# EAGLE board PCB-3 v28 (EAGLE 9.7.0)
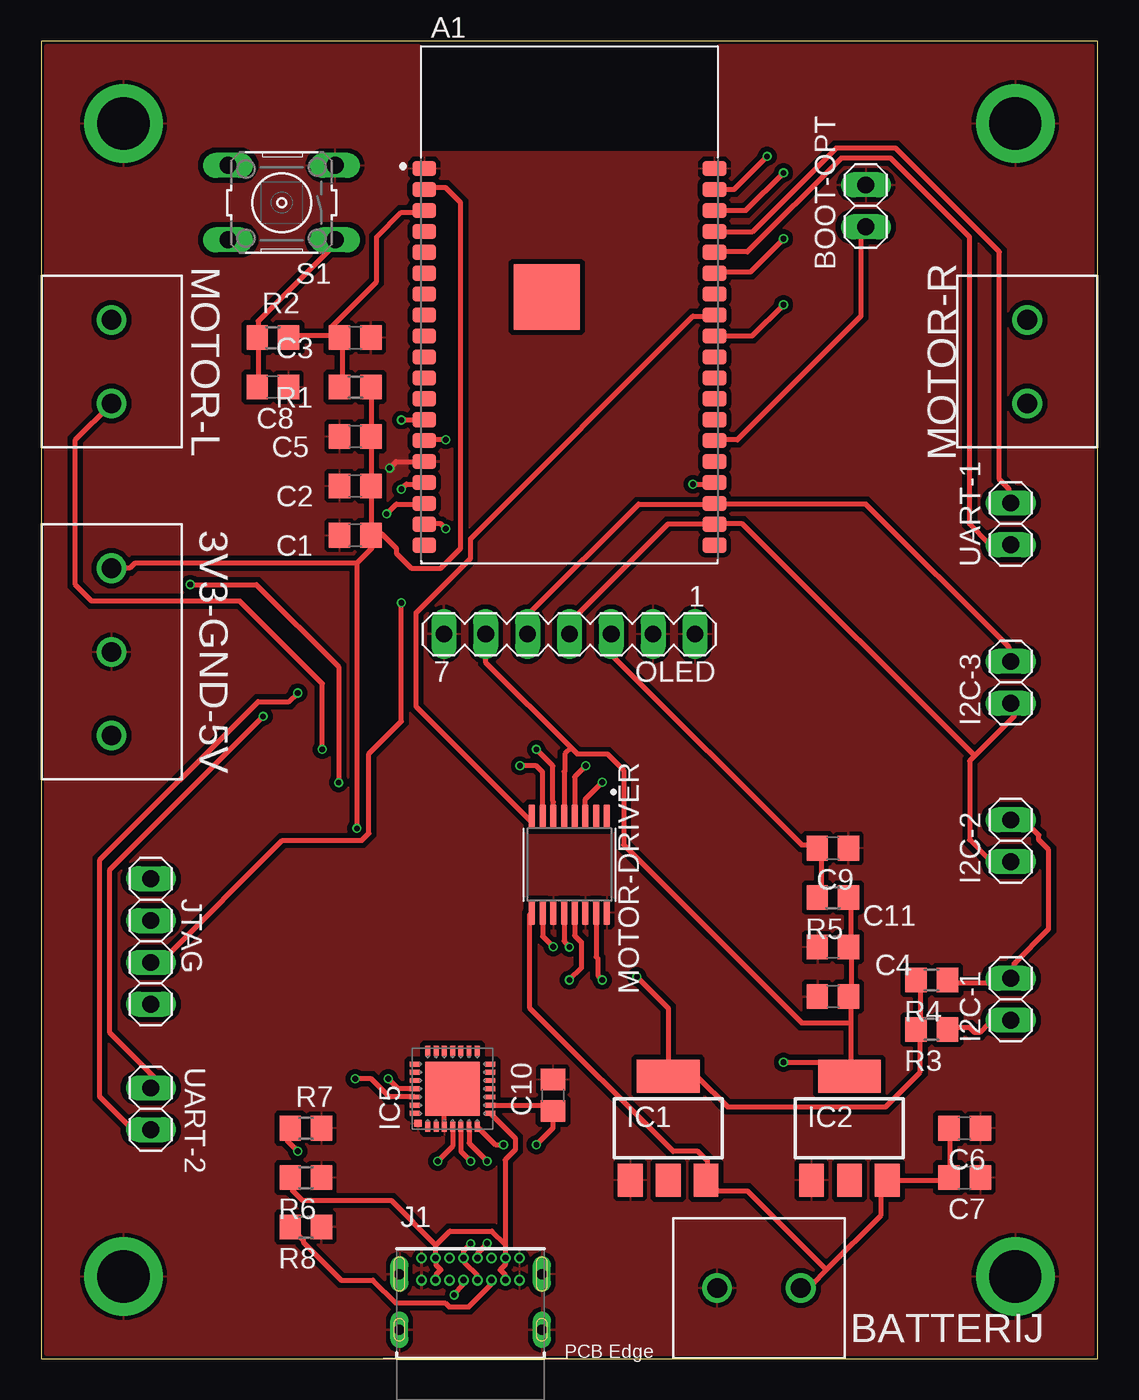
[diagram p0: board, top side]
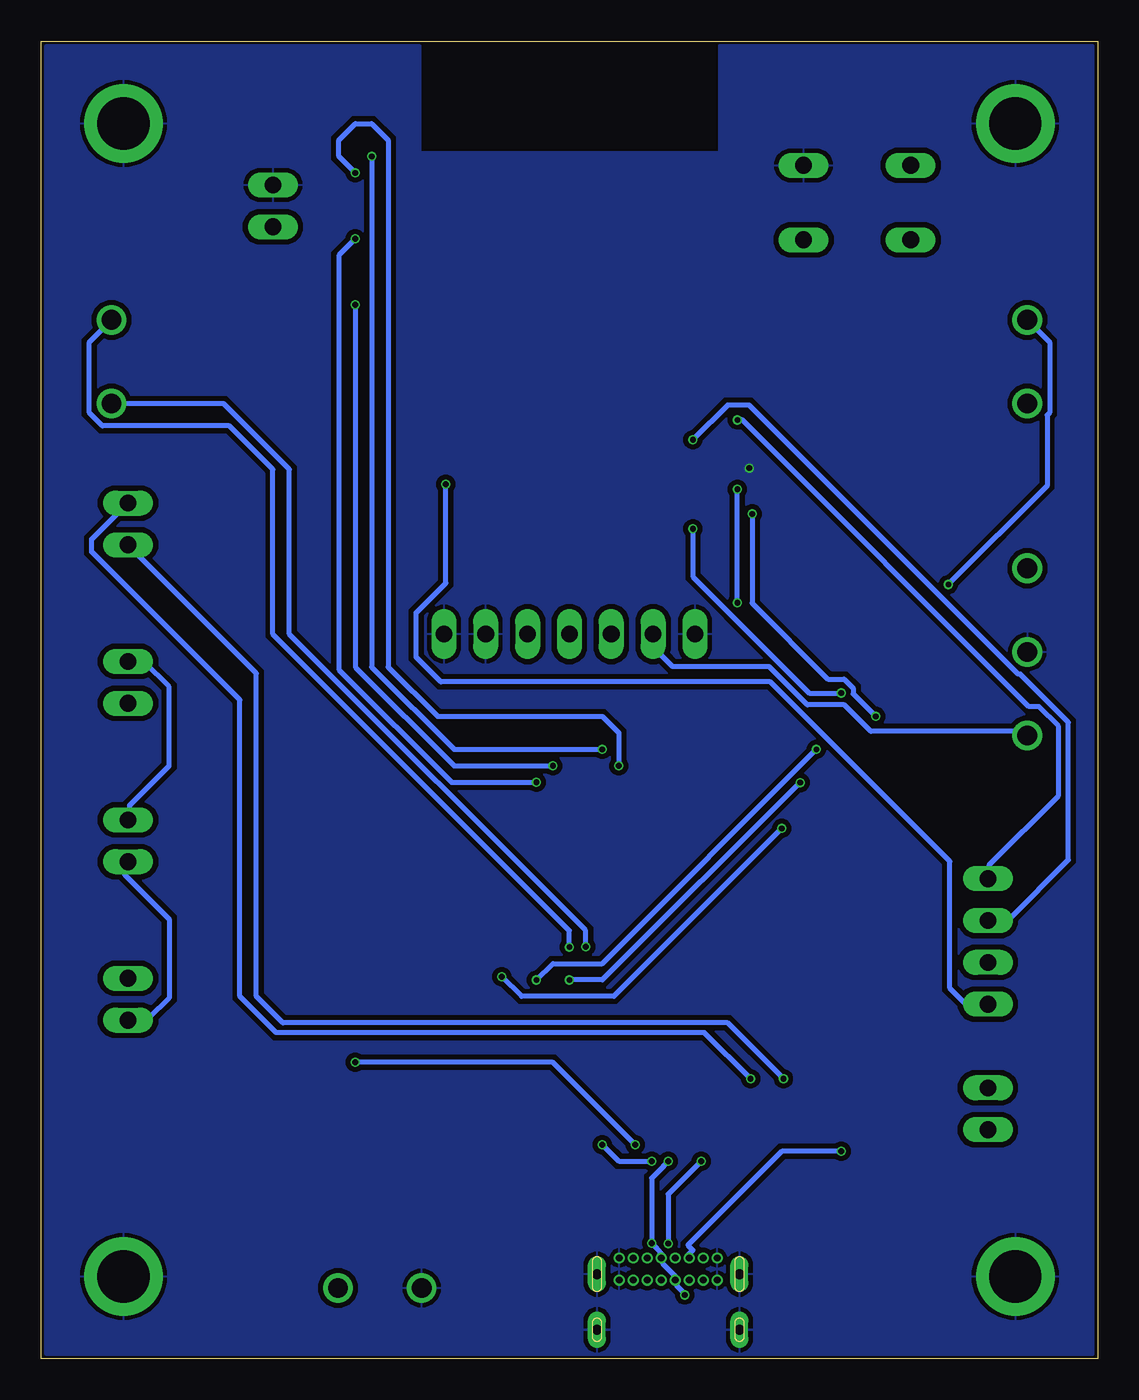
[diagram p1: board, bottom side, seen from below]

Size 64.14 x 80 mm. Coordinates in mm from the lower left corner, seen from the top.
Outline: 0,80 0,0 64.14,0 64.14,80 0,80
Copper layers (1*16): Top 0.035mm / dielectric 1.5mm / Bottom 0.035mm
Design rules "LPKF-S63_Design-Rules": minimum track width 0.3mm, minimum drill 0.35mm, track to track 0.3mm, track to pad 0.3mm, pad to pad 0.2mm, via to via 0.3mm, smd to smd 0.25mm, copper to edge 0.2mm, drill to drill 0.3mm, minimum pad ring 0.1mm, minimum via ring 0.1mm, stop-mask expansion 4mil, vias tented up to drill 0mil, thermal gap 10mil

## Footprints (pad centres in the part's own frame; a part is rotated, then mirrored left to right if it is on the bottom)
TERMBLK_508-3N = drill 1.2: 1 0,0; 2 5.08,0; 3 10.16,0
XCVR_ESP32-WROVER-I = smd 1.45 x 0.93: 1 -8.81,8.26; 2 -8.81,6.99; 3 -8.81,5.72; 4 -8.81,4.45; 5 -8.81,3.18; 6 -8.81,1.91; 7 -8.81,0.64; 8 -8.81,-0.63; 9 -8.81,-1.9; 10 -8.81,-3.17; 11 -8.81,-4.44; 12 -8.81,-5.71; 13 -8.81,-6.98; 14 -8.81,-8.25; 15 -8.81,-9.52; 16 -8.81,-10.79; 17 -8.81,-12.06; 18 -8.81,-13.33; 19 -8.81,-14.6; 20 8.81,-14.6; 21 8.81,-13.33; 22 8.81,-12.06; 23 8.81,-10.79; 24 8.81,-9.52; 25 8.81,-8.25; 26 8.81,-6.98; 27 8.81,-5.71; 28 8.81,-4.44; 29 8.81,-3.17; 30 8.81,-1.9; 31 8.81,-0.63; 32 8.81,0.64; 33 8.81,1.91; 34 8.81,3.18; 35 8.81,4.45; 36 8.81,5.72; 37 8.81,6.99; 38 8.81,8.26 | smd 4 x 4: 39 -1.38,0.47
TERMBLK_508-2N = drill 1.2: 1 0,0; 2 5.08,0
1X02 = drill 1.016 long: 1 -1.27,0; 2 1.27,0
C0805 = smd 1.3 x 1.5: 1 -0.95,0; 2 0.95,0
SOT223 = smd 1.5 x 2: 1 -2.3,-3.15; 2 0,-3.15; 3 2.3,-3.15 | smd 3.8 x 2: 4 0,3.15
MLP28 = smd 0.6 x 0.3: 1 -2.3,1.5; 2 -2.3,1; 3 -2.3,0.5; 4 -2.3,0; 5 -2.3,-0.5; 6 -2.3,-1; 7 -2.3,-1.5; 15 2.3,-1.5; 16 2.3,-1; 17 2.3,-0.5; 18 2.3,0; 19 2.3,0.5; 20 2.3,1; 21 2.3,1.5 | smd 0.3 x 0.6: 8 -1.5,-2.3; 9 -1,-2.3; 10 -0.5,-2.3; 11 0,-2.3; 12 0.5,-2.3; 13 1,-2.3; 14 1.5,-2.3; 22 1.5,2.3; 23 1,2.3; 24 0.5,2.3; 25 0,2.3; 26 -0.5,2.3; 27 -1,2.3; 28 -1.5,2.3 | smd 3.3 x 3.3: EXP 0,0 | smd 0.435 x 0.435: M -2.103,2.103
GCT_USB4085-GF-A_REVA4 = drill 0.4 pad 0.65: A1 -2.975,4.025; A4 -2.125,4.025; A5 -1.275,4.025; A6 -0.425,4.025; A7 0.425,4.025; A8 1.275,4.025; A9 2.125,4.025; A12 2.975,4.025; B1 2.975,2.675; B4 2.125,2.675; B5 1.275,2.675; B6 0.425,2.675; B7 -0.425,2.675; B8 -1.275,2.675; B9 -2.125,2.675; B12 -2.975,2.675 | drill 0.6 pad 1.108 long: P1 -4.325,3.045; P2 4.325,3.045; P3 4.325,-0.335; P4 -4.325,-0.335
1X04 = drill 1.016 long: 1 -3.81,0; 2 -1.27,0; 3 1.27,0; 4 3.81,0
BEAGLEBONEBLACK_MOUNTING_HOLE = drill 3.175 pad 4.445: P$1 0,0
SOP65P640X110-16N = smd 1.49 x 0.4: 1 -2.915,2.275; 2 -2.915,1.625; 3 -2.915,0.975; 4 -2.915,0.325; 5 -2.915,-0.325; 6 -2.915,-0.975; 7 -2.915,-1.625; 8 -2.915,-2.275; 9 2.915,-2.275; 10 2.915,-1.625; 11 2.915,-0.975; 12 2.915,-0.325; 13 2.915,0.325; 14 2.915,0.975; 15 2.915,1.625; 16 2.915,2.275
MA07-1 = drill 1.016 long: 1 -7.62,0; 2 -5.08,0; 3 -2.54,0; 4 0,0; 5 2.54,0; 6 5.08,0; 7 7.62,0
R0805 = smd 1.3 x 1.5: 1 -0.95,0; 2 0.95,0
B3F-10XX = drill 1.016 long: 1 -3.251,2.261; 2 3.251,2.261; 3 -3.251,-2.261; 4 3.251,-2.261

## Placement (x,y rotation side)
3V3-GND-5V  2828XX-3282837-3  [TERMBLK_508-3N]  4.27,48 270 top
A1  ESP32-WROVER-I  [XCVR_ESP32-WROVER-I]  32.07,64 0 top
BATTERIJ  2828XX-2282837-2  [TERMBLK_508-2N]  46.12,4.3 180 top
BOOT-OPT  PINHD-1X2  [1X02]  50.07,70 90 top
C1  22uF  [C0805]  19.07,50 180 top
C2  0.1uF  [C0805]  19.07,53 180 top
C3  0.1uF  [C0805]  19.07,62 0 top
C4  10uF  [C0805]  48.07,22 0 top
C5  10uF  [C0805]  19.07,56 0 top
C6  100nF  [C0805]  56.07,14 180 top
C7  100nF  [C0805]  56.07,11 180 top
C8  0.1uF  [C0805]  14.07,59 180 top
C9  100nF  [C0805]  48.07,31 180 top
C10  1uF  [C0805]  31.07,16 90 top
C11  1uF  [C0805]  48.07,25 180 top
I2C-1  PINHD-1X2  [1X02]  58.87,21.83 90 top
I2C-2  PINHD-1X2  [1X02]  58.87,31.45 90 top
I2C-3  PINHD-1X2  [1X02]  58.87,41.07 90 top
IC1  LD117AS33TR  [SOT223]  38.07,14 0 top
IC2  LD117AS50TR  [SOT223]  49.07,14 0 top
IC5  CP2102  [MLP28]  24.98,16.4 90 top
J1  USB4085-GF-A_REVA4  [GCT_USB4085-GF-A_REVA4]  26.07,2.1 0 top
JTAG  PINHD-1X4  [1X04]  6.66,25.34 270 top
MGT1  BEAGLEBONEBLACK_MOUNTING_HOLE  [BEAGLEBONEBLACK_MOUNTING_HOLE]  5,5 0 top
MGT2  BEAGLEBONEBLACK_MOUNTING_HOLE  [BEAGLEBONEBLACK_MOUNTING_HOLE]  59.14,5 0 top
MGT3  BEAGLEBONEBLACK_MOUNTING_HOLE  [BEAGLEBONEBLACK_MOUNTING_HOLE]  59.14,75 0 top
MGT4  BEAGLEBONEBLACK_MOUNTING_HOLE  [BEAGLEBONEBLACK_MOUNTING_HOLE]  5,75 0 top
MOTOR-DRIVER  TC78H621FNG  [SOP65P640X110-16N]  32.07,30 270 top
MOTOR-L  2828XX-2282837-2  [TERMBLK_508-2N]  4.27,58 90 top
MOTOR-R  2828XX-2282837-2  [TERMBLK_508-2N]  59.87,63.08 270 top
OLED  [MA07-1]  32.07,44 180 top
R1  10k  [R0805]  19.07,59 180 top
R2  10k  [R0805]  14.07,62 180 top
R3  4k7  [R0805]  54.07,20 180 top
R4  4k7  [R0805]  54.07,23 180 top
R5  10k  [R0805]  48.07,28 180 top
R6  10k  [R0805]  16.07,11 180 top
R7  5.1k  [R0805]  16.07,14 0 top
R8  5.1k  [R0805]  16.07,8 180 top
S1  [B3F-10XX]  14.6,70.2 180 top
UART-1  PINHD-1X2  [1X02]  58.87,50.69 90 top
UART-2  PINHD-1X2  [1X02]  6.66,15.18 270 top

## Library data of the parts
3V3-GND-5V = Connector; CATEGORY: Connector; DESCRIPTION: TERM BLK 3P SIDE ENT 5.08mm PCB; MANUFACTURER: TE Connectivity; MPN: 282837-3; OPERATING_TEMPERATURE: -40°C to +105°C; PART_STATUS: Active; ROHS_COMPLIANCE: RoHS Compliant; SERIES: 282837; SUBCATEGORY: Terminal Block; TYPE: Side Wire Entry
A1 = ESP32-WROVER-I; DESCRIPTION: Module: combo; GPIO, I2C x2, I2S x2, SDIO, SPI x3, UART x3; U.FL; DIGI-KEY_PART_NUMBER: 1904-1008-1-ND; DIGI-KEY_PURCHASE_URL: https://www.digikey.com/product-detail/en/espressif-systems/ESP32-WROVER-I/1904-1008-1-ND/8544303?utm_source=snapeda&utm_medium=aggregator&utm_campaign=symbol; MF: Espressif Systems; MP: ESP32-WROVER-I; PACKAGE: Module Espressif Systems
BATTERIJ MOTOR-L MOTOR-R = Connector; CATEGORY: Connector; DESCRIPTION: 2 Position Wire to Board Terminal Block Horizontal with Board 5.08 mm Through Hole; MANUFACTURER: TE Connectivity; MPN: 282837-2; OPERATING_TEMPERATURE: -40°C to +105°C; PART_STATUS: ACTIVE; ROHS_COMPLIANCE: RoHS Compliant; SERIES: 282837; SUBCATEGORY: Terminal Block; TYPE: Side Wire Entry
BOOT-OPT I2C-1-I2C-3 JTAG UART-1 UART-2 = Connector; CATEGORY: CONNECTOR; SUB-CATEGORY: PIN-HEADER
C1-C11 = rcl; SPICEPREFIX: C
IC1 IC2 = v-reg
IC5 = silabs; MF: FARNELL; MPN: CP2102-GM; OC_FARNELL: 9282130; OC_NEWARK: 30K5635
J1 = USB4085-GF-A_REVA4; MANUFACTURER: Global Connector Technology; MAXIMUM_PACKAGE_HEIGHT: 3.46mm; PARTREV: A4; STANDARD: Manufacturer Recommendations
MGT1-MGT4 = BeagleBone_Black_Wireless
MOTOR-DRIVER = TC78H621FNG
OLED = con-lstb; OC_FARNELL: unknown; OC_NEWARK: unknown
R1-R8 = rcl; SPICEPREFIX: R
S1 = switch-omron; MPN: B3F-1000; OC_FARNELL: 176432; OC_NEWARK: 36M3542

## Nets
3V3: 3V3-GND-5V.1 A1.2 C1.1 C2.1 C5.2 IC1.4 R1.1 R3.2 R4.2
5V: 3V3-GND-5V.3 C4.2 C11.1 IC2.4 IC5.7 MOTOR-DRIVER.5 OLED.6 R5.1
7V: BATTERIJ.1 C6.2 C7.2 IC1.3 IC2.3 MOTOR-DRIVER.9
AO1: MOTOR-DRIVER.15 MOTOR-L.1
AO2: MOTOR-DRIVER.13 MOTOR-L.2
BO1: MOTOR-DRIVER.12 MOTOR-R.1
BO2: MOTOR-DRIVER.10 MOTOR-R.2
CC1: J1.A5 R7.1
CC2: J1.B5 R8.2
D+: IC5.4 J1.A6 J1.B6
D-: IC5.5 J1.A7 J1.B7
EN: A1.3 C3.1 R1.2 R2.1
EXP: A1.39
GND: 3V3-GND-5V.2 A1.1 A1.15 A1.38 BATTERIJ.2 BOOT-OPT.2 C1.2 C2.2 C3.2 C4.1 C5.1 C6.1 C7.1 C8.1 C9.1 C10.2 C11.2 IC1.1 IC2.1 IC5.3 IC5.EXP IC5.M J1.A1 J1.A12 J1.B1 J1.B12 J1.P1 J1.P2 J1.P3 J1.P4 MGT1.P$1 MGT2.P$1 MGT3.P$1 MGT4.P$1 MOTOR-DRIVER.11 MOTOR-DRIVER.14 MOTOR-DRIVER.16 OLED.1 OLED.2 OLED.7 R6.1 R7.2 R8.1 S1.3
IO0: A1.25 BOOT-OPT.1
IO12: A1.14 JTAG.2
IO13: A1.16 JTAG.3
IO14: A1.13 JTAG.1
IO15: A1.23 JTAG.4
IO18: A1.30 MOTOR-DRIVER.4
IO19: A1.31 MOTOR-DRIVER.8
IO21: A1.33 MOTOR-DRIVER.3
IO22: A1.36 MOTOR-DRIVER.7
IO23: A1.37 MOTOR-DRIVER.6
N$2: C9.2 OLED.3 R5.2
N$3: C8.2 R2.2 S1.1
RX-1: A1.34 IC5.26 UART-1.1
RX-2: A1.17 UART-2.1
SCL: A1.22 I2C-1.2 I2C-2.2 I2C-3.2 OLED.5 R4.1
SDA: A1.21 I2C-1.1 I2C-2.1 I2C-3.1 OLED.4 R3.1
TX-1: A1.35 IC5.25 UART-1.2
TX-2: A1.18 UART-2.2
VBUS: IC5.8 J1.A4 J1.A9 J1.B4 J1.B9 R6.2
VDD: C10.1 IC5.6 IC5.9

## Tracks (layer width: path | path; a pad name or v marks a point on that pad's centre or on a via)
3V3  (via drill 0.35)
  Top 0.3: R4.2 53.37,22.8 53.37,20.1 R3.2 53.37,19.8 53.37,17.4 51.27,15.3 41.67,15.3 39.87,17.1 38.07,17.1 IC1.4 38.07,21.3 v36.17,23.2 | 20.07,50.1 20.67,50.1 21.57,49.2 21.57,48.9 22.47,48 24.27,48 25.47,49.2 25.47,70.2 24.57,71.1 23.37,71.1 A1.2 | 20.07,50.1 20.07,52.8 C2.1 20.07,53.1 20.07,55.8 C5.2 20.07,56.1 20.07,58.8 R1.1 | 20.07,50.1 C1.1 20.07,49.8 20.07,49.2 19.17,48.3 | 3V3-GND-5V.1 5.37,48 5.67,48.3 19.17,48.3 | 19.17,48.3 v19.17,32.2
  Bottom 0.3: v19.17,32.2 29.37,22 34.97,22 v36.17,23.2
5V  (via drill 0.35)
  Top 0.3: R5.1 49.17,27.9 49.17,25.2 C11.1 49.17,24.9 49.17,22.2 C4.2 49.17,21.9 49.17,20.4 | 49.17,20.4 49.17,17.4 IC2.4 49.07,17.85 49.22,18 v45.07,18 | 49.17,20.4 46.17,20.4 35.37,31.2 35.37,35.73 34.37,36.73 32.55,36.73 32.17,37.1 | 32.17,37.1 26.97,42.3 26.97,43.8 OLED.6 | MOTOR-DRIVER.5 31.75,35.65 31.8,35.7 31.8,36.73 32.17,37.1 | IC5.7 27.57,13 v28.07,13
  Bottom 0.3: OLED.6 26.97,43.8 26.97,43.2 25.8,42.03 19.95,42.03 17.62,39.7 15.37,39.7 13.77,38.1 4.47,38.1 3V3-GND-5V.3 | v28.07,13 33.07,18 v45.07,18
7V
  Top 0.3: C6.2 55.17,13.8 55.17,11.1 C7.2 54.87,10.8 51.57,10.8 IC2.3 51.27,10.8 50.97,10.5 50.97,8.7 47.67,5.4 | 47.67,5.4 46.77,4.5 46.17,4.5 BATTERIJ.1 | MOTOR-DRIVER.9 29.67,27 29.67,21.3 38.37,12.6 39.87,12.6 40.47,12 40.47,11.1 IC1.3 40.47,10.8 41.07,10.2 42.87,10.2 47.67,5.4
AO1  (via drill 0.35)
  Top 0.3: v34.07,23 33.8,23.27 33.8,24.3 33.7,24.4 MOTOR-DRIVER.15 | v17.07,37 17.07,41 12.07,46 3.07,46 2.07,47 2.07,55.8 MOTOR-L.1
  Bottom 0.3: v34.07,23 33.07,24 30.07,24 v17.07,37
AO2  (via drill 0.35)
  Top 0.3: v32.07,23 32.8,23.73 32.8,25.3 32.4,25.7 MOTOR-DRIVER.13 | v18.06,34.99 18.06,42.01 13.07,47 v9.07,47 v9.06,47.01
  Bottom 0.3: MOTOR-L.2 2.92,61.73 2.92,57.44 3.07,57.29 3.07,53 v9.06,47.01 | v32.07,23 30.07,23 18.08,34.99 v18.06,34.99
BO1  (via drill 0.35)
  Top 0.3: MOTOR-DRIVER.12 31.75,25.38 31.81,25.31 31.81,25.26 v32.07,25
  Bottom 0.3: v32.07,25 32.07,26 50.07,44 50.07,54 52.72,56.65 60.43,56.65 61.22,57.44 61.22,61.73 MOTOR-R.1
BO2  (via drill 0.35)
  Top 0.3: MOTOR-DRIVER.10 30.45,25.65 v31.08,25.01
  Bottom 0.3: MOTOR-R.2 53.07,58 49.07,54 49.07,44 31.08,26.01 v31.08,25.01
CC1  (via drill 0.35)
  Top 0.3: v15.57,12.6 14.97,13.2 14.97,13.8 R7.1
  Bottom 0.3: v15.57,12.6 19.17,12.6 24.87,6.9 24.57,6.6 24.87,6.3 J1.A5
CC2
  Top 0.3: R8.2 15.92,7.2 15.92,7.06 18.21,4.78 20.14,4.78 21.52,3.4 24.52,3.4 24.77,3.15 25.97,3.15 27.27,4.45 27.27,4.7 J1.B5
D+  (via drill 0.35)
  Top 0.3: J1.B6 26.5,5.03 25.72,5.8 25.72,6.05 J1.A6 25.64,6.58 v26.07,7 | IC5.4 24.98,12.91 v24.07,12
  Bottom 0.3: v24.07,12 26.07,10 v26.07,7
D-  (via drill 0.35)
  Top 0.3: J1.B7 25.57,4.7 25.57,4.45 25.07,3.95 v25.07,3.88 | IC5.5 25.48,12.59 v26.07,12 | J1.A7 26.5,6.4 27.07,6.97 v27.07,7.03
  Bottom 0.3: v25.07,3.88 25.07,3.95 25.57,4.45 25.57,4.95 26.42,5.8 26.42,6.33 26.8,6.7 26.8,6.75 v27.07,7.03 27.07,10.97 26.34,11.7 26.34,11.72 v26.07,12
EN
  Top 0.3: 17.97,62.1 17.67,62.4 17.67,62.7 20.37,65.4 20.37,68.1 21.87,69.6 23.07,69.6 A1.3 | R1.2 18.27,59.1 18.27,61.8 C3.1 17.97,62.1 | 17.97,62.1 15.27,62.1 R2.1
GND  (via drill 0.35)
  Top 0.3: IC5.3 24.48,15.41 25.07,16 25.07,16.3 IC5.EXP | A1.15 21.55,54.48 v21.15,54.08
  pour Top: 0.07,80 64.07,80 64.07,0 0.07,0
  pour Bottom: 0.07,80 64.07,80 64.07,0 0.07,0
IO0
  Top 0.3: A1.25 41.07,55.8 42.27,55.8 49.77,63.3 49.77,68.4 50.07,68.7 BOOT-OPT.1
IO12  (via drill 0.35)
  Top 0.3: v24.57,55.8 23.37,55.8 A1.14
  Bottom 0.3: v24.57,55.8 22.47,57.9 21.16,57.9 4.83,41.57 4.69,41.57 1.77,38.65 1.77,30.3 5.37,26.7 6.57,26.7 JTAG.2
IO13  (via drill 0.35)
  Top 0.3: v21.87,52.8 22.17,53.1 23.07,53.1 A1.16 | v21.87,45.9 21.87,38.7 19.89,36.73 19.89,31.9 19.47,31.48 14.64,31.48 7.47,24.3 6.87,24.3 JTAG.3
  Bottom 0.3: v21.87,45.9 v21.87,52.8
IO14  (via drill 0.35)
  Top 0.3: v21.87,57 23.07,57 A1.13
  Bottom 0.3: v21.87,57 21.57,57 4.17,39.6 3.57,39.6 2.37,38.4 2.37,34.2 6.57,30 6.57,29.4 JTAG.1
IO15  (via drill 0.35)
  Top 0.3: v39.57,53.1 40.77,53.1 A1.23
  Bottom 0.3: v39.57,53.1 39.57,47.1 41.37,45.3 41.37,42.6 39.87,41.1 19.87,41.1 8.97,30.2 8.97,22.5 8.07,21.6 6.87,21.6 JTAG.4
IO18  (via drill 0.35)
  Top 0.3: A1.30 43.17,62.1 v45.07,64 | v33.07,36 32.4,35.33 MOTOR-DRIVER.4
  Bottom 0.3: v45.07,64 45.07,42 39.07,36 v33.07,36
IO19
  Top 0.3: A1.31 40.77,63.3 39.57,63.3 26.07,49.8 26.07,48.6 22.77,45.3 22.77,39.6 29.67,32.7 MOTOR-DRIVER.8
IO21  (via drill 0.35)
  Top 0.3: A1.33 40.97,66 43.07,66 v45.07,68 | MOTOR-DRIVER.3 33.05,33.98 v34.07,35
  Bottom 0.3: v45.07,68 46.07,67 46.07,41.85 39.22,35 v34.07,35
IO22  (via drill 0.35)
  Top 0.3: A1.36 42.79,69.72 v45.07,72 | MOTOR-DRIVER.7 30.45,35.62 30.07,36 v29.07,36
  Bottom 0.3: v29.07,36 29.07,38 30.07,39 40.07,39 43.07,42 43.07,74 44.07,75 45.07,75 46.07,74 46.07,73 v45.07,72
IO23  (via drill 0.35)
  Top 0.3: A1.37 42.07,71 v44.07,73 | MOTOR-DRIVER.6 31.09,33.82 31.07,33.84 31.07,36 v30.07,37
  Bottom 0.3: v30.07,37 39.07,37 44.07,42 v44.07,73
N$2
  Top 0.3: R5.2 47.37,28.2 47.37,30.9 C9.2 47.07,31.2 46.17,31.2 34.77,42.6 34.77,43.8 OLED.3
N$3
  Top 0.3: C8.2 13.17,59.1 13.17,61.8 R2.2 13.17,62.1 13.17,63 17.97,67.8 S1.1
RX-1  (via drill 0.35)
  Top 0.3: A1.34 41.07,67.2 42.87,67.2 48.57,72.9 51.57,72.9 56.37,68.1 56.37,50.7 57.57,49.5 58.77,49.5 UART-1.1 | v19.07,17 20.05,17 21.15,15.9 IC5.26
  Bottom 0.3: UART-1.1 51.07,41.62 51.07,22 49.47,20.4 22.47,20.4 v19.07,17
RX-2  (via drill 0.35)
  Top 0.3: v20.97,51.3 21.57,51.9 23.07,51.9 A1.17 | v13.47,39 4.17,29.7 4.17,19.8 6.87,17.1 6.87,16.5 UART-2.1
  Bottom 0.3: v13.47,39 14.84,40.38 14.84,40.73 15.39,41.27 16.37,41.27 20.97,45.88 v20.97,51.3
SCL
  Top 0.3: OLED.5 29.67,44.1 29.67,45.3 36.27,51.9 40.77,51.9 A1.22 41.07,51.9 50.07,51.9 58.77,43.2 58.77,42.6 I2C-3.2 | R4.1 55.17,22.8 58.47,22.8 58.77,23.1 I2C-1.2 59.07,23.1 59.07,24 61.17,26.1 61.17,30.9 60.57,31.5 60.57,31.8 59.67,32.7 59.07,32.7 I2C-2.2
  Bottom 0.3: I2C-3.2 58.77,42.3 57.87,42.3 56.37,40.8 56.37,36 58.77,33.6 58.77,33 I2C-2.2
SDA
  Top 0.3: OLED.4 32.07,44.7 38.07,50.7 40.77,50.7 A1.21 41.07,50.7 42.57,50.7 56.67,36.6 | R3.1 55.17,20.1 56.37,20.1 56.67,19.8 56.97,19.8 57.57,20.4 58.77,20.4 I2C-1.1 | 56.67,36.6 59.07,39 59.07,39.6 I2C-3.1 | 56.67,36.6 56.37,36.3 56.37,31.5 57.57,30.3 58.77,30.3 I2C-2.1
  Bottom 0.3: I2C-1.1 58.77,20.7 57.57,20.7 56.37,21.9 56.37,26.7 59.07,29.4 59.07,30 I2C-2.1
TX-1  (via drill 0.35)
  Top 0.3: A1.35 41.07,68.4 43.17,68.4 48.27,73.5 51.87,73.5 58.17,67.2 58.17,53.4 58.77,52.8 58.77,52.2 UART-1.2 | IC5.25 21.67,16.4 v21.07,17
  Bottom 0.3: UART-1.2 61.07,49.76 61.07,49 52.07,40 52.07,22 49.87,19.8 23.87,19.8 v21.07,17
TX-2  (via drill 0.35)
  Top 0.3: v24.57,50.4 24.27,50.7 23.37,50.7 A1.18 | UART-2.2 6.57,14.1 5.37,14.1 3.57,15.9 3.57,30.3 13.17,39.9 15.05,39.9 v15.57,40.42
  Bottom 0.3: v15.57,40.42 17.5,40.42 24.57,47.5 v24.57,50.4
VBUS
  Top 0.3: J1.B4 28.17,4.8 28.17,5.1 27.87,5.4 28.17,5.7 28.17,6 J1.A9 28.17,6.3 28.17,6.95 | J1.B9 23.97,4.8 23.97,5.1 24.27,5.4 23.97,5.7 23.97,6 J1.A4 23.97,6.3 23.97,6.9 | 23.97,6.9 21.27,9.6 15.87,9.6 15.27,10.2 15.27,10.8 R6.2 | 23.97,6.9 24.82,7.75 27.37,7.75 28.17,6.95 | 28.17,6.95 28.17,12.07 28.8,12.7 28.8,13.38 IC5.8
VDD  (via drill 0.35)
  Top 0.3: IC5.9 30.72,15.4 C10.1 31.07,14 v30.07,13 | IC5.6 25.98,13.09 v27.07,12
  Bottom 0.3: v30.07,13 29.07,12 v27.07,12